# EAGLE board RFBoardLayoutGen0_v03.1routing_saved (EAGLE 7.2.0)
AUTHOR: Kirchschlager Raimund
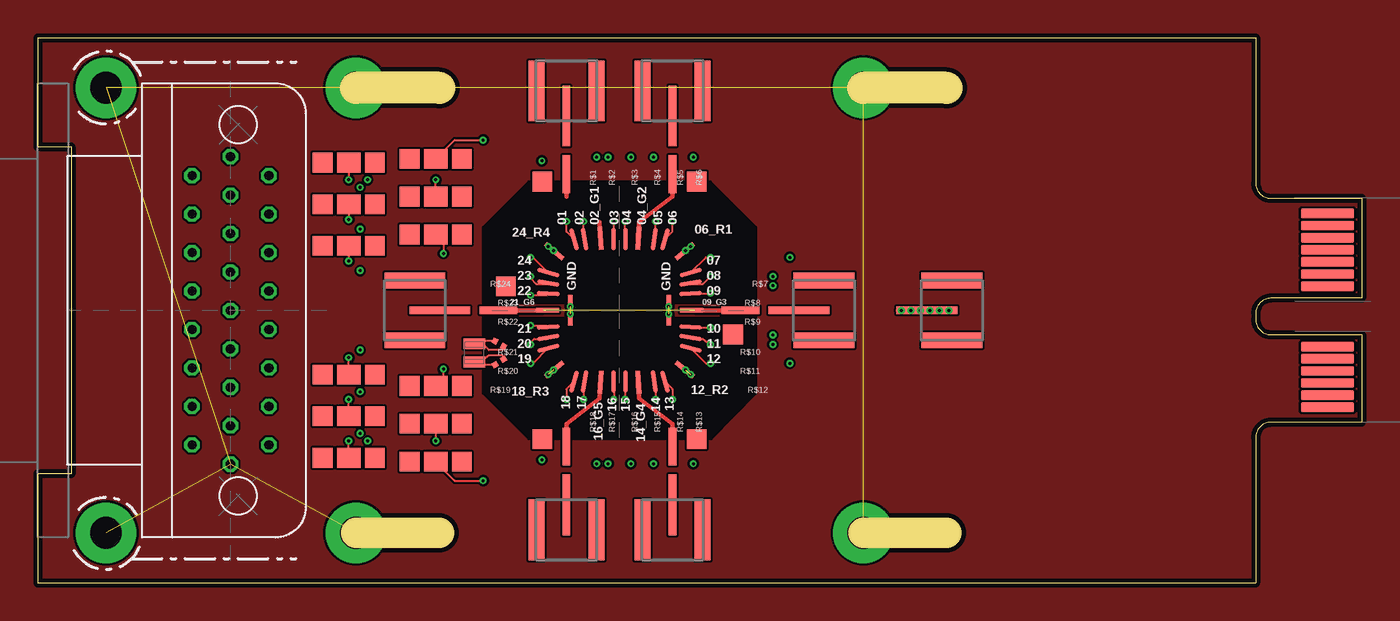
[diagram p0: board, top side]
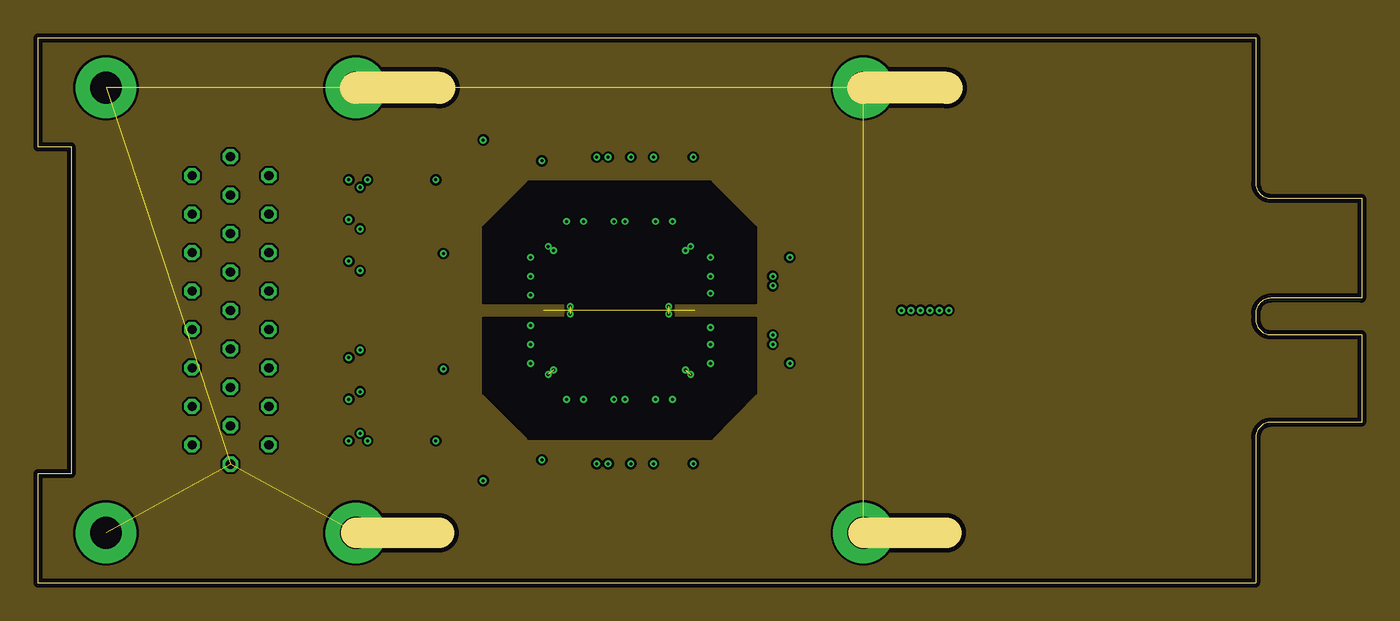
[diagram p1: board, inner layer Route2]
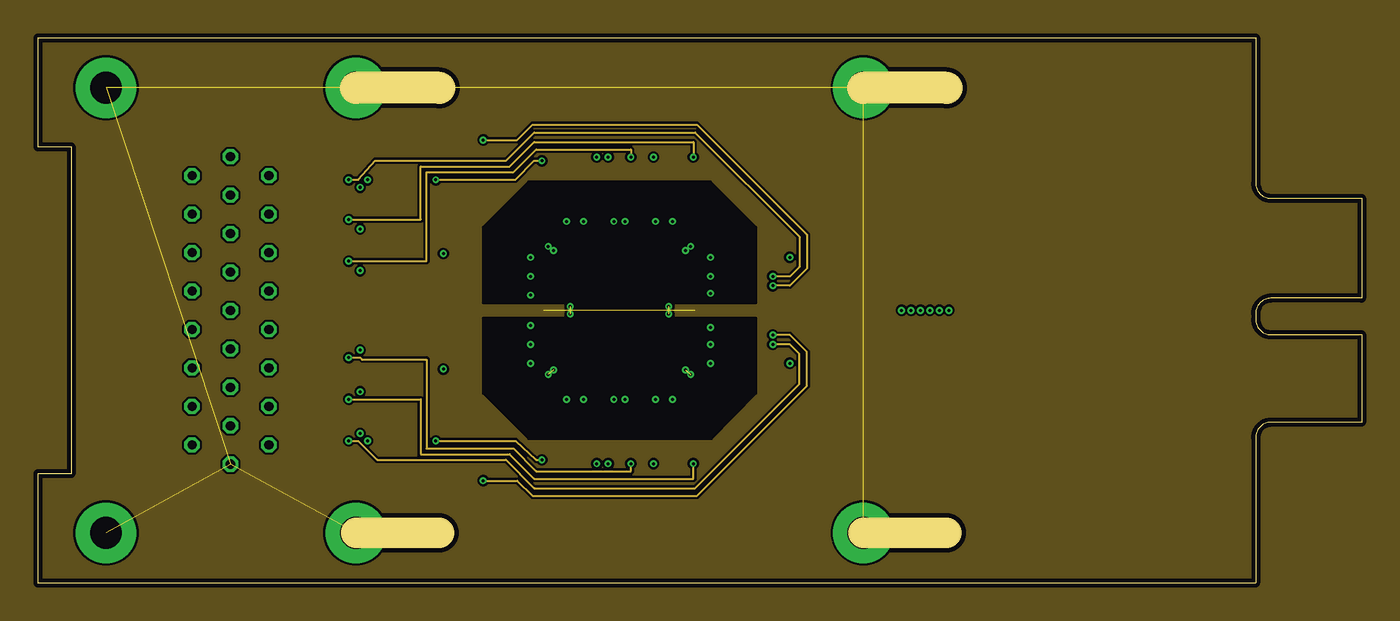
[diagram p2: board, inner layer Route3]
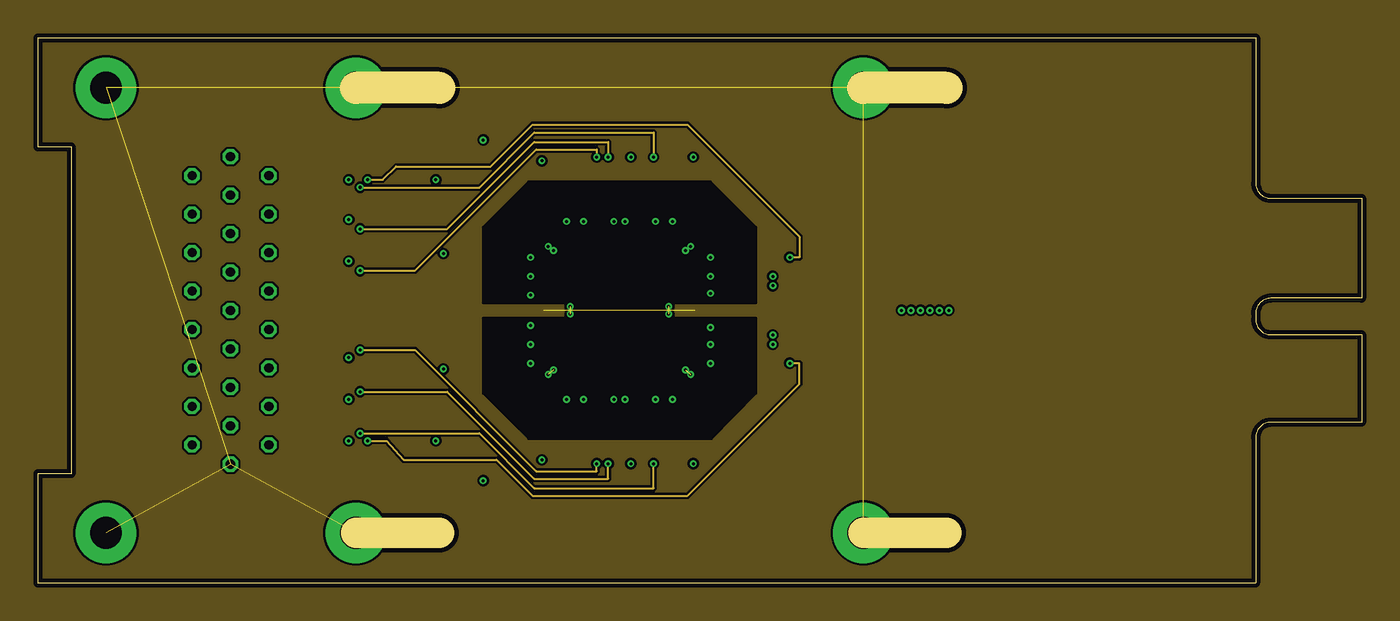
[diagram p3: board, inner layer Route14]
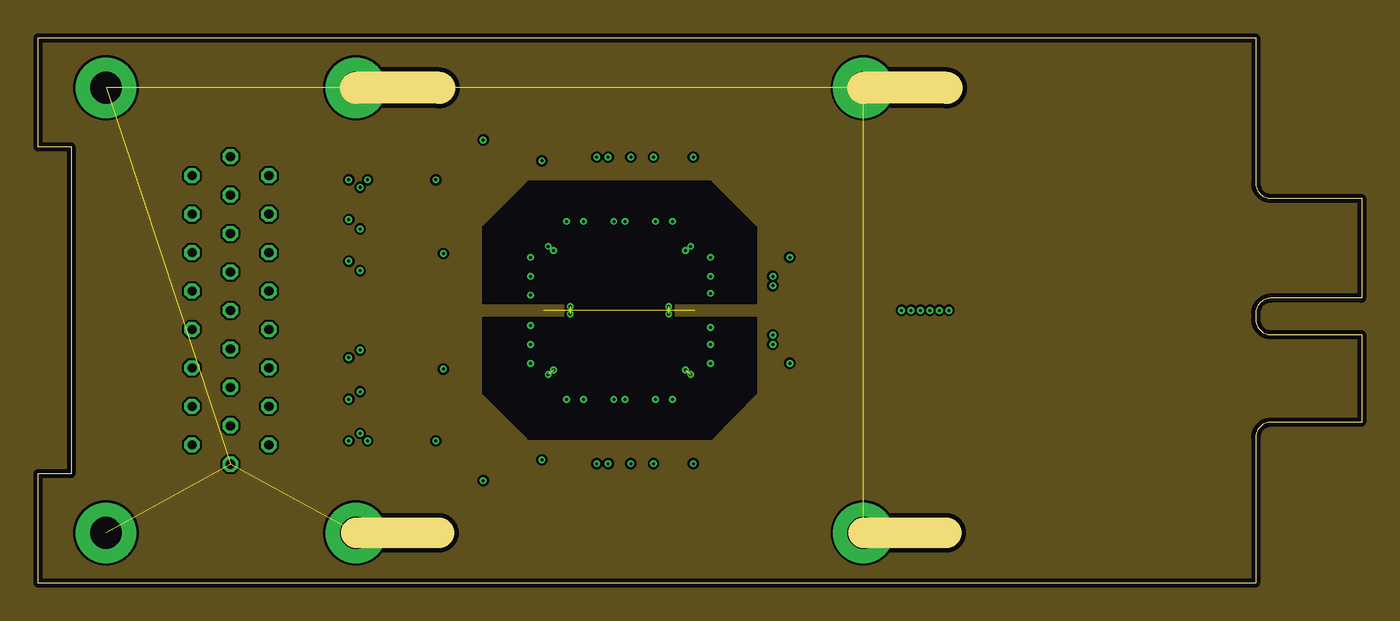
[diagram p4: board, inner layer Route15]
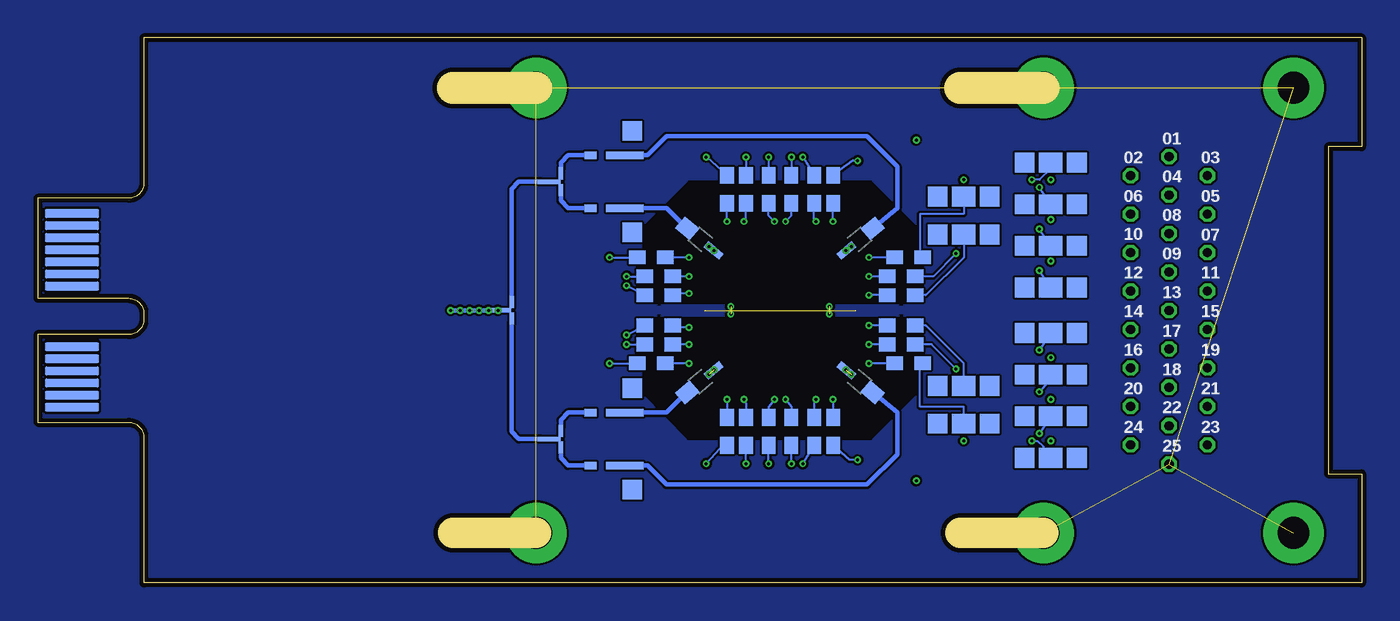
[diagram p5: board, bottom side, seen from below]

Size 87.4 x 36 mm. Coordinates in mm from the lower left corner, seen from the top.
Outline: 26.5,3.3 21,3.3
Outline: 26.5,32.7 21,32.7
Outline: 60,32.7 54.5,32.7
Outline: 60,3.3 54.5,3.3
Outline: 0,36 0,28.8 2.2,28.8 2.2,7.2 0,7.2 0,0 80.4,0 80.4,9.6 arc-90 81.4,10.6 87.4,10.6 87.4,16.4 81.4,16.4 arc-90 80.4,17.4 80.4,17.8 arc-90 81.4,18.8 87.4,18.8 87.4,25.4 81.4,25.4 arc-90 80.4,26.4 80.4,36 0,36
Copper layers (1+2+3*14+15+16): Top 0.035mm / dielectric 0.2mm / Route2 0.035mm / dielectric 0.36mm / Route3 0.035mm / dielectric 0.28mm / Route14 0.035mm / dielectric 0.36mm / Route15 0.035mm / dielectric 0.2mm / Bottom 0.035mm
Design rules "PCB-POOL HighSpec_ML6+": minimum track width 0.125mm, minimum drill 0.2mm, track to track 0.125mm, track to pad 0.125mm, pad to pad 0.125mm, via to via 0.125mm, smd to smd 0.125mm, copper to edge 0.3mm, drill to drill 0.2mm, minimum pad ring 0.2mm, minimum via ring 0.125mm, stop-mask expansion 0.075mm, vias tented up to drill 0.3mm, thermal gap 0.2mm
Net classes: 0 GND: clearance 0.15 mm; 1 RF: clearance 2 mm

## Footprints (pad centres in the part's own frame; a part is rotated, then mirrored left to right if it is on the bottom)
BIAS_TEE_DOWN_0603 = smd 0.8 x 0.5: HF 2.75,0 | smd 1.3 x 1.3: LF 0,1.6 | smd 2.5 x 0.5: OUT 0.5,0
BIAS_TEE_UP_0603 = smd 0.8 x 0.5: HF 2.75,0 | smd 1.3 x 1.3: LF 0,-1.6 | smd 2.5 x 0.5: OUT 0.5,0
24DC+10RF/400MU-PADS/0.7X0.7_V1.0 = smd 1.5 x 0.3 rotated 105: DC$01 -3,4.7 | smd 1.5 x 0.3 rotated 99: DC§02 -2.3,4.7 | smd 0.3 x 1.5: DC§03 -0.4,4.7; DC§04 0.4,4.7; DC§15 0.4,-4.7; DC§16 -0.4,-4.7 | smd 1.5 x 0.3 rotated 81: DC§05 2.3,4.7 | smd 1.5 x 0.3 rotated 75: DC§06 3,4.7 | smd 1.5 x 0.3 rotated 195: DC§07 4.7,2.5 | smd 1.5 x 0.3 rotated 189: DC§08 4.7,1.8 | smd 1.5 x 0.3 rotated 183: DC§09 4.7,1.1 | smd 1.5 x 0.3 rotated 177: DC§10 4.7,-1.1 | smd 1.5 x 0.3 rotated 171: DC§11 4.7,-1.8 | smd 1.5 x 0.3 rotated 165: DC§12 4.7,-2.5 | smd 1.5 x 0.3 rotated 285: DC§13 3,-4.7 | smd 1.5 x 0.3 rotated 279: DC§14 2.3,-4.7 | smd 1.5 x 0.3 rotated 261: DC§17 -2.3,-4.7 | smd 1.5 x 0.3 rotated 255: DC§18 -3,-4.7 | smd 1.5 x 0.3 rotated 15: DC§19 -4.7,-2.5 | smd 1.5 x 0.3 rotated 9: DC§20 -4.7,-1.8 | smd 1.5 x 0.3 rotated 3: DC§21 -4.7,-1.1 | smd 1.5 x 0.3 rotated 357: DC§22 -4.7,1.1 | smd 1.5 x 0.3 rotated 351: DC§23 -4.7,1.8 | smd 1.5 x 0.3 rotated 345: DC§24 -4.7,2.5 | smd 0.3 x 2: GND$1 -3.25,0; GND$2 3.25,0 | smd 1.5 x 0.3 rotated 93: RF$02_G1 -1.25,4.75 | smd 1.5 x 0.3 rotated 87: RF$04_G2 1.25,4.75 | smd 1.5 x 0.3: RF$06_G3 4.75,0; RF$21_G6 -4.75,0 | smd 1.5 x 0.3 rotated 40: RF$06_R1 4.3,3.9; RF$18_R3 -4.3,-3.9 | smd 1.5 x 0.3 rotated 140: RF$12_R2 4.3,-3.9; RF$24_R4 -4.3,3.9 | smd 1.5 x 0.3 rotated 273: RF$14_G4 1.25,-4.75 | smd 1.5 x 0.3 rotated 267: RF$16_G5 -1.25,-4.75
25_SOCKET_M83513/13-D = drill 0.6 octagon: 01 10.16,0; 02 8.89,2.54; 03 6.35,2.54; 04 3.81,2.54; 05 2.54,0; 06 1.27,2.54; 07 0,0; 08 -1.27,2.54; 09 -2.54,0; 10 -3.81,2.54; 11 -6.35,2.54; 12 -8.89,2.54; 13 -10.16,0; 14 8.89,-2.54; 15 7.62,0; 16 6.35,-2.54; 17 5.08,0; 18 3.81,-2.54; 19 1.27,-2.54; 20 -1.27,-2.54; 21 -3.81,-2.54; 22 -5.08,0; 23 -6.35,-2.54; 24 -7.62,0; 25 -8.89,-2.54
MEC8-113-02-L-D-RA1 = smd 0.6 x 3.5: 1 6.4,0.15; 3 5.6,0.15; 5 4.8,0.15; 7 4,0.15; 9 3.2,0.15; 11 2.4,0.15; 13 -1.6,0.15; 15 -2.4,0.15; 17 -3.2,0.15; 19 -4,0.15; 21 -4.8,0.15; 23 -5.6,0.15; 25 -6.4,0.15 | smd 0.6 x 3.5 bottom: 2 6.4,0.15; 4 5.6,0.15; 6 4.8,0.15; 8 4,0.15; 10 3.2,0.15; 12 2.4,0.15; 14 -1.6,0.15; 16 -2.4,0.15; 18 -3.2,0.15; 20 -4,0.15; 22 -4.8,0.15; 24 -5.6,0.15; 26 -6.4,0.15
SMD0.8-0,5 = smd 0.8 x 0.5: 1 0,0
RX-BR_V1 = smd 1.422 x 0.711 rotated 45: P$2 -0.02,-0.87; P$3 -0.87,-0.02 | smd 0.406 x 0.406 rotated 165: P$5 1.23,0.63; P$8 1.08,-0.02 | smd 0.406 x 0.406 rotated 105: P$6 0.63,1.23; P$7 -0.02,1.08
T_JUNCTION_0.3MM = smd 0.3 x 1.5 bottom: P$1 0,-0.75 | smd 0.8 x 0.3 bottom: P$2 -0.55,0.03; P$3 0.55,0.03 | smd 1 x 0.125 bottom: P$4 0,-0.06
L_MATCH = smd 1.3 x 0.5: 1 -1.15,0 | smd 1.25 x 1: 2 1.125,0
LP-FILTER/1_STAGE/OS/0603_TOP = smd 1.3 x 1.3: $1 1.85,0.01; $6 -1.6,0.01 | smd 1.55 x 1.3: $4 0.125,0.01
LP-FILTER/1_STAGE/OS/0603_BOTTOM = smd 1.3 x 1.3 bottom: $1 -1.6,0.01; $6 1.85,0.01 | smd 1.55 x 1.3 bottom: $4 0.125,0.01
LP-FILTER/RESISTOR/0603_BOTTOM = smd 1.1 x 0.9 bottom: IN -0.925,0; OUT 0.925,0
SMP_STRAIGHT_MINI = smd 0.5 x 4: 1 0,1.653 | smd 1.05 x 4: 2@1 -1.975,0; 2@2 1.975,0

## Placement (x,y rotation side)
B$1  [BIAS_TEE_DOWN_0603]  34.9,26.5 90 top
B$2  [BIAS_TEE_UP_0603]  41.9,26.5 90 top
B$3  [BIAS_TEE_UP_0603]  45.9,18 0 top
B$4  [BIAS_TEE_DOWN_0603]  41.9,9.5 270 top
B$5  [BIAS_TEE_UP_0603]  34.9,9.5 270 top
B$6  [BIAS_TEE_UP_0603]  30.9,18 180 top
B$7  [BIAS_TEE_UP_0603]  48.15,28.25 180 bottom
B$8  [BIAS_TEE_DOWN_0603]  48.15,24.75 180 bottom
B$9  [BIAS_TEE_UP_0603]  48.15,11.25 180 bottom
B$10  [BIAS_TEE_DOWN_0603]  48.15,7.75 180 bottom
E$1  [24DC+10RF/400MU-PADS/0.7X0.7_V1.0]  38.4,18 0 top
E$2  [25_SOCKET_M83513/13-D]  12.71,18 90 top
E$3  [MEC8-113-02-L-D-RA1]  85,18 270 top
E$30  [SMD0.8-0,5]  50.9,11.25 0 bottom
E$40  [RX-BR_V1]  29.44,15.19 315 top
E$48  [T_JUNCTION_0.3MM]  52.9,9.5 90 top
E$50  [T_JUNCTION_0.3MM]  56.15,18 90 top
E$51  [T_JUNCTION_0.3MM]  52.9,26.5 90 top
L$1  [L_MATCH]  33.14,22.7 40 bottom
L$2  [L_MATCH]  43.66,22.7 140 bottom
L$3  [L_MATCH]  43.66,13.3 220 bottom
L$4  [L_MATCH]  33.14,13.3 320 bottom
LP$1  [LP-FILTER/1_STAGE/OS/0603_TOP]  20.4,27.75 0 top
LP$2  [LP-FILTER/1_STAGE/OS/0603_TOP]  20.4,25 0 top
LP$3  [LP-FILTER/1_STAGE/OS/0603_TOP]  20.4,22.25 0 top
LP$4  [LP-FILTER/1_STAGE/OS/0603_TOP]  20.4,13.75 0 top
LP$5  [LP-FILTER/1_STAGE/OS/0603_TOP]  20.4,11 0 top
LP$6  [LP-FILTER/1_STAGE/OS/0603_TOP]  20.4,8.25 0 top
LP$7  [LP-FILTER/1_STAGE/OS/0603_BOTTOM]  20.4,27.75 0 top
LP$8  [LP-FILTER/1_STAGE/OS/0603_BOTTOM]  20.4,25 0 top
LP$9  [LP-FILTER/1_STAGE/OS/0603_BOTTOM]  20.4,22.25 0 top
LP$10  [LP-FILTER/1_STAGE/OS/0603_BOTTOM]  20.4,19.5 0 top
LP$11  [LP-FILTER/1_STAGE/OS/0603_BOTTOM]  20.4,16.5 0 top
LP$12  [LP-FILTER/1_STAGE/OS/0603_BOTTOM]  20.4,13.75 0 top
LP$13  [LP-FILTER/1_STAGE/OS/0603_BOTTOM]  20.4,11 0 top
LP$14  [LP-FILTER/1_STAGE/OS/0603_BOTTOM]  20.4,8.25 0 top
LP$15  [LP-FILTER/1_STAGE/OS/0603_TOP]  26.15,28 0 top
LP$16  [LP-FILTER/1_STAGE/OS/0603_TOP]  26.15,25.5 0 top
LP$17  [LP-FILTER/1_STAGE/OS/0603_TOP]  26.15,23 0 top
LP$18  [LP-FILTER/1_STAGE/OS/0603_TOP]  26.15,13 0 top
LP$19  [LP-FILTER/1_STAGE/OS/0603_TOP]  26.15,10.5 0 top
LP$20  [LP-FILTER/1_STAGE/OS/0603_TOP]  26.15,8 0 top
LP$21  [LP-FILTER/1_STAGE/OS/0603_BOTTOM]  26.15,25.5 0 top
LP$22  [LP-FILTER/1_STAGE/OS/0603_BOTTOM]  26.15,23 0 top
LP$23  [LP-FILTER/1_STAGE/OS/0603_BOTTOM]  26.15,13 0 top
LP$24  [LP-FILTER/1_STAGE/OS/0603_BOTTOM]  26.15,10.5 0 top
R$1  10K  [LP-FILTER/RESISTOR/0603_BOTTOM]  34.9,26 270 top
R$2  10K  [LP-FILTER/RESISTOR/0603_BOTTOM]  36.15,26 270 top
R$3  10K  [LP-FILTER/RESISTOR/0603_BOTTOM]  37.65,26 270 top
R$4  10K  [LP-FILTER/RESISTOR/0603_BOTTOM]  39.15,26 270 top
R$5  10K  [LP-FILTER/RESISTOR/0603_BOTTOM]  40.65,26 270 top
R$6  10K  [LP-FILTER/RESISTOR/0603_BOTTOM]  41.9,26 270 top
R$7  10K  [LP-FILTER/RESISTOR/0603_BOTTOM]  46.9,21.5 180 top
R$8  10K  [LP-FILTER/RESISTOR/0603_BOTTOM]  46.4,20.25 180 top
R$9  10K  [LP-FILTER/RESISTOR/0603_BOTTOM]  46.4,19 180 top
R$10  10K  [LP-FILTER/RESISTOR/0603_BOTTOM]  46.4,17 180 top
R$11  10K  [LP-FILTER/RESISTOR/0603_BOTTOM]  46.4,15.75 180 top
R$12  10K  [LP-FILTER/RESISTOR/0603_BOTTOM]  46.9,14.5 180 top
R$13  10K  [LP-FILTER/RESISTOR/0603_BOTTOM]  41.9,10 270 top
R$14  10K  [LP-FILTER/RESISTOR/0603_BOTTOM]  40.65,10 270 top
R$15  10K  [LP-FILTER/RESISTOR/0603_BOTTOM]  39.15,10 270 top
R$16  10K  [LP-FILTER/RESISTOR/0603_BOTTOM]  37.65,10 270 top
R$17  10K  [LP-FILTER/RESISTOR/0603_BOTTOM]  36.15,10 270 top
R$18  10K  [LP-FILTER/RESISTOR/0603_BOTTOM]  34.9,10 270 top
R$19  10K  [LP-FILTER/RESISTOR/0603_BOTTOM]  29.9,14.5 180 top
R$20  10K  [LP-FILTER/RESISTOR/0603_BOTTOM]  30.4,15.75 180 top
R$21  10K  [LP-FILTER/RESISTOR/0603_BOTTOM]  30.4,17 180 top
R$22  10K  [LP-FILTER/RESISTOR/0603_BOTTOM]  30.4,19 180 top
R$23  10K  [LP-FILTER/RESISTOR/0603_BOTTOM]  30.4,20.25 180 top
R$24  10K  [LP-FILTER/RESISTOR/0603_BOTTOM]  29.9,21.5 180 top
S$1  [SMP_STRAIGHT_MINI]  24.9,18 270 top
S$2  [SMP_STRAIGHT_MINI]  34.9,3.5 0 top
S$3  [SMP_STRAIGHT_MINI]  41.9,3.5 0 top
S$4  [SMP_STRAIGHT_MINI]  51.9,18 90 top
S$5  [SMP_STRAIGHT_MINI]  60.35,18 90 top
S$6  [SMP_STRAIGHT_MINI]  41.9,32.5 180 top
S$7  [SMP_STRAIGHT_MINI]  34.9,32.5 180 top

## Library data of the parts
B$1-B$10 = Bias tee
E$1 = SampleArea
E$2 = Glenair
E$3 = MEC8-130-02-X-D-RA1
E$30 = PADS
E$40 = TempSensors
E$48 E$50 E$51 = RF layout parts
L$1-L$4 = MatchCircuit
LP$1-LP$24 R$1-R$24 = LPFilter
S$1-S$7 = RF Connectors

## Nets
S$67: E$2.24
S$76: E$2.11
S$80: E$2.12
S$83: E$2.23
S$85: E$2.25
S$88: E$2.01
S$90: E$2.10
S$95: E$2.22
S$144: E$2.14
S$146: E$2.02
S$149: E$2.15
S$151: E$2.03
S$154: E$2.09
S$156: E$2.21
S$158: E$2.08
S$160: E$2.20
S$162: E$2.16
S$163 [RF]: E$1.RF$04_G2
S$166: E$1.DC§24 R$24.IN
S$168: E$2.17
S$170: E$2.05
S$171: E$2.07
S$174: E$2.13
S$175: E$2.06
S$178: E$2.18
S$180: E$1.DC§23 R$23.IN
S$181: E$1.DC§22 R$22.IN
S$183: E$3.12
S$184: E$1.DC§21 R$21.IN
S$185: E$1.DC§20 R$20.IN
S$186: E$1.DC§19 R$19.IN
S$187: E$1.DC$01 R$1.OUT
S$188: E$1.DC§02 R$2.OUT
S$189: E$1.DC§03 R$3.OUT
S$190: E$3.23
S$191: E$1.DC§04 R$4.OUT
S$193: E$1.DC§05 R$5.OUT
S$194: E$1.DC§06 R$6.OUT
S$195: E$1.DC§07 R$7.OUT
S$196: E$1.DC§08 R$8.OUT
S$199: E$1.DC§09 R$9.OUT
S$201: E$1.DC§10 R$10.OUT
S$202: E$1.DC§11 R$11.OUT
S$203: E$1.DC§12 R$12.OUT
S$204: E$1.DC§13 R$13.IN
S$205: E$1.DC§14 R$14.IN
S$206: E$1.DC§17 R$17.IN
S$207: E$1.DC§16 R$16.IN
S$208: E$1.DC§15 R$15.IN
S$209: E$1.DC§18 R$18.IN
S$216: LP$22.$4 R$22.OUT
S$217: LP$17.$4 R$23.OUT
S$218: LP$21.$4 R$24.OUT
S$219: LP$23.$4 R$21.OUT
S$220: LP$18.$4 R$20.OUT
S$221: LP$24.$4 R$19.OUT
S$222: LP$16.$4 R$1.IN
S$223: LP$19.$4 R$18.OUT
S$224: LP$11.$4 R$17.OUT
S$225: LP$10.$4 R$2.IN
S$226: LP$12.$4 R$16.OUT
S$227: LP$4.$4 R$15.OUT
S$228: LP$13.$4 R$14.OUT
S$229: LP$5.$4 R$13.OUT
S$230: LP$9.$4 R$3.IN
S$231: LP$3.$4 R$4.IN
S$232: LP$8.$4 R$5.IN
S$233: LP$2.$4 R$6.IN
S$234: LP$7.$4 R$7.IN
S$235: LP$1.$4 R$8.IN
S$236: LP$14.$4 R$12.IN
S$237: LP$6.$4 R$11.IN
S$238: LP$15.$4 R$9.IN
S$239: LP$20.$4 R$10.IN

## Tracks (layer width: path | path; a pad name or v marks a point on that pad's centre or on a via)
GND1
  pour Top (rank 6): -4.85,39.6 92.1,39.7 92.1,-4.7 -4.85,-4.8
  pour Route2 (rank 6): -7.5,41.1 92.6,41.6 92.6,-5.15 -7.5,-5.65
  pour Route15 (rank 6): -11.25,44.5 94.9,44.5 94.9,-11.4 -11.25,-11.4
  pour Bottom (rank 6): -16.65,49.3 97.15,49.2 97.15,-15.85 -16.65,-15.75
  pour Route3 (rank 6): -15.4,47.8 96.4,47.8 96.4,-13.85 -15.4,-13.75
  pour Route14 (rank 6): -12.9,45.3 95.9,45.2 95.9,-12.85 -12.9,-12.75
S$1  (via drill 0.2)
  Bottom 0.3: v57.02,18 v60.15,18
S$2
  Bottom 0.3: 50.9,28.25 52.4,28.25 52.87,27.75 52.87,27.25
S$12
  Bottom 0.3: 49.65,24.75 45.9,24.75 44.65,23.5
S$17
  Bottom 0.3: 52.87,25.75 52.87,25.25 52.4,24.75 50.9,24.75
S$55
  Bottom 0.3: 54.15,26.5 55.65,26.5 56.12,26 56.12,18.75
S$68
  Bottom 0.3: 32.15,23.5 30.65,24.75 30.65,27.5 32.65,29.5 45.9,29.5 47.15,28.25 48.4,28.25
S$79
  Bottom 0.3: 49.65,11.25 45.9,11.25 44.65,12.5
S$81
  Bottom 0.3: 50.9,11.25 52.4,11.25 52.87,10.75 52.87,10.25
S$82
  Top 0.5: 60.4,18 56.9,18
S$84
  Bottom 0.3: 50.9,7.75 52.4,7.75 52.87,8.25 52.87,8.75
S$86
  Bottom 0.3: 54.15,9.5 55.65,9.5 56.12,10 56.12,17.25
S$89
  Bottom 0.3: 48.4,7.75 47.15,7.75 45.9,6.5 32.65,6.5 30.65,8.5 30.65,11.25 32.15,12.5
S$91
  Top 0.3: 37.09,23.83 37.15,22.75
S$155
  Top 0.3: 34.9,28 34.9,25.5
S$157
  Top 0.3: 37.15,13.25 37.09,12.17 34.9,10.5 34.9,8
S$159  (1 unrouted)
  Top 0.3: 29.65,18 33.4,18 | 43.4,18 47.15,18
S$161
  Top 0.3: 39.65,13.25 39.7,12.17 41.9,10.5
S$163
  Top 0.3: 41.9,28 41.9,25.5 39.7,23.83 E$1.RF$04_G2
S$164
  Top 0.3: 41.9,10.5 41.9,8
S$165
  cutout Route2: 44.46,9.51 42.9,9.5 32.4,9.5 29.4,12.5 29.4,17.5 35.4,17.5 35.4,18.5 29.4,18.5 29.4,23.5 32.4,26.5 44.4,26.5 47.4,23.5 47.4,18.5 41.4,18.5 41.4,17.5 47.4,17.5 47.4,12.5
  cutout Route3: 44.46,9.51 42.9,9.5 32.4,9.5 29.4,12.5 29.4,17.5 35.4,17.5 35.4,18.5 29.4,18.5 29.4,23.5 32.4,26.5 44.4,26.5 47.4,23.5 47.4,18.5 41.4,18.5 41.4,17.5 47.4,17.5 47.4,12.5
  cutout Route14: 44.46,9.51 42.9,9.5 32.4,9.5 29.4,12.5 29.4,17.5 35.4,17.5 35.4,18.5 29.4,18.5 29.4,23.5 32.4,26.5 44.4,26.5 47.4,23.5 47.4,18.5 41.4,18.5 41.4,17.5 47.4,17.5 47.4,12.5
  cutout Route15: 44.46,9.51 42.9,9.5 32.4,9.5 29.4,12.5 29.4,17.5 35.4,17.5 35.4,18.5 29.4,18.5 29.4,23.5 32.4,26.5 44.4,26.5 47.4,23.5 47.4,18.5 41.4,18.5 41.4,17.5 47.4,17.5 47.4,12.5
  cutout Top: 44.46,9.51 42.9,9.5 32.4,9.5 29.4,12.5 29.4,17.5 35.4,17.5 35.4,18.5 29.4,18.5 29.4,23.5 32.4,26.5 44.4,26.5 47.4,23.5 47.4,18.5 41.4,18.5 41.4,17.5 47.4,17.5 47.4,12.5
  cutout Bottom: 44.46,9.51 42.9,9.5 32.4,9.5 29.4,12.5 29.4,17.5 35.4,17.5 35.4,18.5 29.4,18.5 29.4,23.5 32.4,26.5 44.4,26.5 47.4,23.5 47.4,18.5 41.4,18.5 41.4,17.5 47.4,17.5 47.4,12.5
S$166  (via drill 0.2)
  Top 0.125: v32.52,21.5 32.7,21.5 E$1.DC§24
  Bottom 0.125: R$24.IN v32.52,21.5
S$167  (via drill 0.2)
  other vias: 33.7,22.23 33.7,22.23
S$169  (via drill 0.2)  (1 unrouted)
  other vias: 33.7,13.77 34.04,14.06
S$172  (via drill 0.2)  (1 unrouted)
  other vias: 43.1,13.77 42.76,14.06
S$173  (via drill 0.2)
  other vias: 42.76,21.94
S$174  (via drill 2.1 pad 4)  (6 unrouted)
  other vias: 54.5,3.3 21,32.7 4.5,32.7 21,3.3 54.5,32.7 4.5,3.3
S$176  (via drill 0.2)  (1 unrouted)
  other vias: 41.65,17.75 41.65,18.25
S$177  (via drill 0.2)  (1 unrouted)
  other vias: 35.15,17.75 35.15,18.25
S$180  (via drill 0.2)
  Top 0.125: v32.52,20.25 32.52,20.12 32.9,19.75 33.65,19.75 E$1.DC§23
  Bottom 0.125: R$23.IN v32.52,20.25
S$181  (via drill 0.2)
  Top 0.125: v32.52,19 33.6,19 E$1.DC§22
  Bottom 0.125: R$22.IN v32.52,19
S$184  (via drill 0.2)
  Top 0.125: v32.52,17 33.6,17 E$1.DC§21
  Bottom 0.125: R$21.IN v32.52,17
S$185  (via drill 0.2)
  Top 0.125: v32.52,15.75 32.52,15.88 32.77,16.12 33.62,16.12 E$1.DC§20
  Bottom 0.125: R$20.IN v32.52,15.75
S$186  (via drill 0.2)
  Top 0.125: v32.52,14.5 32.7,14.5 E$1.DC§19
  Bottom 0.125: R$19.IN v32.52,14.5
S$187  (via drill 0.2)
  Top 0.125: E$1.DC$01 34.9,23.2 v34.9,23.88
  Bottom 0.125: v34.9,23.88 R$1.OUT
S$188  (via drill 0.2)
  Top 0.125: E$1.DC§02 36.02,22.77 v36.02,23.88
  Bottom 0.125: v36.02,23.88 36.15,24 R$2.OUT
S$189  (via drill 0.2)
  Top 0.125: E$1.DC§03 38.02,22.73 v38.02,23.88
  Bottom 0.125: v38.02,23.88 37.65,24.25 R$3.OUT
S$191  (via drill 0.2)
  Top 0.125: E$1.DC§04 38.77,22.73 v38.77,23.88
  Bottom 0.125: v38.77,23.88 39.15,24.25 R$4.OUT
S$192
  Top 0.125: 30.23,14.4 29.17,14.4
S$193  (via drill 0.2)
  Top 0.125: E$1.DC§05 40.77,22.77 v40.77,23.88
  Bottom 0.125: v40.77,23.88 40.65,24 R$5.OUT
S$194  (via drill 0.2)
  Top 0.125: E$1.DC§06 41.9,23.2 v41.9,23.88
  Bottom 0.125: v41.9,23.88 R$6.OUT
S$195  (via drill 0.2)
  Top 0.125: E$1.DC§07 44.1,21.5 v44.4,21.5
  Bottom 0.125: v44.4,21.5 R$7.OUT
S$196  (via drill 0.2)
  Top 0.125: E$1.DC§08 43.15,19.75 43.9,19.75 v44.4,20.25
  Bottom 0.125: v44.4,20.25 R$8.OUT
S$197
  Top 0.125: 29.08,14.48 29.79,15.02 30.67,15.02 30.76,14.75
S$198
  Top 0.125: 30.05,15.99 29.17,15.99
S$199  (via drill 0.2)
  Top 0.125: E$1.DC§09 43.12,19.12 v44.4,19.12
  Bottom 0.125: v44.4,19.12 45.4,19.12 R$9.OUT
S$200
  Top 0.125: 29.35,15.81 29.79,15.37 30.67,15.37 30.76,15.63
S$201  (via drill 0.2)
  Top 0.125: E$1.DC§10 43.12,16.88 v44.4,16.88
  Bottom 0.125: v44.4,16.88 45.02,16.88 45.15,17 R$10.OUT
S$202  (via drill 0.2)
  Top 0.125: E$1.DC§11 43.17,16.12 43.9,16.12 v44.4,15.75
  Bottom 0.125: v44.4,15.75 R$11.OUT
S$203  (via drill 0.2)
  Top 0.125: E$1.DC§12 44.1,14.5 v44.4,14.5
  Bottom 0.125: v44.4,14.5 R$12.OUT
S$204  (via drill 0.2)
  Top 0.125: E$1.DC§13 41.9,12.8 v41.9,12.12
  Bottom 0.125: v41.9,12.12 R$13.IN
S$205  (via drill 0.2)
  Top 0.125: E$1.DC§14 40.77,13.22 v40.77,12.12
  Bottom 0.125: v40.77,12.12 40.65,11.88 R$14.IN
S$206  (via drill 0.2)
  Top 0.125: E$1.DC§17 36.02,13.22 v36.02,12.12
  Bottom 0.125: v36.02,12.12 36.15,11.88 R$17.IN
S$207  (via drill 0.2)
  Top 0.125: E$1.DC§16 38.02,13.28 v38.02,12.12
  Bottom 0.125: v38.02,12.12 37.65,11.62 R$16.IN
S$208  (via drill 0.2)
  Top 0.125: E$1.DC§15 38.77,13.28 v38.77,12.12
  Bottom 0.125: v38.77,12.12 39.15,11.62 R$15.IN
S$209  (via drill 0.2)
  Top 0.125: E$1.DC§18 34.9,12.8 v34.9,12.12
  Bottom 0.125: v34.9,12.12 R$18.IN
S$210  (via drill 0.2)
  other vias: 58.9,18
S$211  (via drill 0.2)
  other vias: 58.27,18
S$212  (via drill 0.2)
  other vias: 59.52,18
S$213  (via drill 0.2)
  other vias: 57.65,18
S$214  (via drill 0.2)
  other vias: 43.1,22.23
S$215  (via drill 0.2)
  other vias: 34.04,21.94
S$216
  Bottom 0.125: LP$22.$4 26.27,21.5 28.77,19 R$22.OUT
S$217  (via drill 0.2)
  Top 0.125: LP$17.$4 26.77,22.76 v26.77,21.75
  Bottom 0.125: v26.77,21.75 28.27,20.25 R$23.OUT
S$218
  Bottom 0.125: LP$21.$4 26.27,24.38 29.15,24.38 29.15,21.5 R$24.OUT
S$219
  Bottom 0.125: LP$23.$4 26.27,14.5 28.77,17 R$21.OUT
S$220  (via drill 0.2)
  Top 0.125: LP$18.$4 26.77,13.26 v26.77,14.12
  Bottom 0.125: v26.77,14.12 28.4,15.75 R$20.OUT
S$221
  Bottom 0.125: LP$24.$4 26.27,11.62 29.15,11.62 29.15,14.5 R$19.OUT
S$222  (via drill 0.2)
  Top 0.125: LP$16.$4 v26.27,26.62
  Route3 0.125: v26.27,26.62 31.52,26.62 32.77,27.88 v33.27,27.88
  Bottom 0.125: v33.27,27.88 33.57,27.88 R$1.IN
S$223  (via drill 0.2)
  Top 0.125: LP$19.$4 v26.27,9.38
  Route3 0.125: v26.27,9.38 31.52,9.38 32.9,8.12 v33.27,8.12
  Bottom 0.125: v33.27,8.12 33.82,8.12 R$18.OUT
S$224  (via drill 0.2)
  Route14 0.125: v21.27,15.38 24.9,15.38 32.9,7.38 36.9,7.38 v36.9,7.88
  Bottom 0.125: LP$11.$4 v21.27,15.38 | v36.9,7.88 R$17.OUT
S$225  (via drill 0.2)
  Route14 0.125: v21.27,20.62 24.9,20.62 32.9,28.62 36.9,28.62 v36.9,28.12
  Bottom 0.125: LP$10.$4 20.77,19.89 v21.27,20.62 | v36.9,28.12 R$2.IN
S$226  (via drill 0.2)
  Route14 0.125: v21.27,12.62 27.02,12.62 32.77,6.88 37.65,6.88 v37.65,7.88
  Bottom 0.125: LP$12.$4 20.52,13.5 v21.27,12.62 | v37.65,7.88 R$16.OUT
S$227  (via drill 0.2)
  Top 0.125: LP$4.$4 v20.52,14.88
  Route3 0.125: v20.52,14.88 21.27,14.88 21.4,14.75 25.65,14.75 25.65,8.88 31.4,8.88 32.9,7.38 39.15,7.38 v39.15,7.88
  Bottom 0.125: v39.15,7.88 R$15.OUT
S$228  (via drill 0.2)
  Route14 0.125: v21.27,9.88 29.15,9.88 32.77,6.25 40.65,6.25 v40.65,7.88
  Bottom 0.125: LP$13.$4 v21.27,9.88 | v40.65,7.88 R$14.OUT
S$229  (via drill 0.2)
  Top 0.125: LP$5.$4 v20.52,12.12
  Route3 0.125: v20.52,12.12 25.27,12.12 25.27,8.5 31.15,8.5 32.77,6.88 43.27,6.88 v43.27,7.88
  Bottom 0.125: v43.27,7.88 42.07,9.2 R$13.OUT
S$230  (via drill 0.2)
  Route14 0.125: v21.27,23.38 27.02,23.38 32.77,29.12 37.65,29.12 v37.65,28.12
  Bottom 0.125: LP$9.$4 v21.27,23.38 | v37.65,28.12 R$3.IN
S$231  (via drill 0.2)
  Top 0.125: LP$3.$4 v20.52,21.25
  Route3 0.125: v20.52,21.25 25.65,21.25 25.65,27.12 31.4,27.12 32.9,28.62 39.15,28.62 v39.15,28.12
  Bottom 0.125: v39.15,28.12 R$4.IN
S$232  (via drill 0.2)
  Route14 0.125: v21.27,26.12 29.15,26.12 32.77,29.75 40.65,29.75 v40.65,28.12
  Bottom 0.125: LP$8.$4 v21.27,26.12 | v40.65,28.12 R$5.IN
S$233  (via drill 0.2)
  Top 0.125: LP$2.$4 v20.52,24
  Route3 0.125: v20.52,24 25.27,24 25.27,27.5 31.15,27.5 32.77,29.12 43.27,29.12 v43.27,28.12
  Bottom 0.125: v43.27,28.12 43.23,28.12 R$6.IN
S$234  (via drill 0.2)
  Route14 0.125: v21.77,26.62 22.77,26.62 23.65,27.5 29.9,27.5 32.65,30.25 42.9,30.25 50.27,22.88 50.27,21.5 v49.65,21.5
  Bottom 0.125: LP$7.$4 20.52,27.38 21.27,26.62 v21.77,26.62 | v49.65,21.5 R$7.IN
S$235  (via drill 0.2)
  Top 0.125: LP$1.$4 v20.52,26.62
  Route3 0.125: v20.52,26.62 21.15,26.62 22.27,27.88 30.9,27.88 32.77,29.75 43.4,29.75 50.27,22.88 50.27,20.88 49.65,20.25 v48.52,20.25
  Bottom 0.125: v48.52,20.25 R$8.IN
S$236  (via drill 0.2)
  Route14 0.125: v21.77,9.38 23.02,9.38 24.15,8.12 30.27,8.12 32.65,5.75 42.9,5.75 50.27,13.12 50.27,14.5 v49.65,14.5
  Bottom 0.125: v49.65,14.5 R$12.IN | v21.77,9.38 21.4,9.38 21.02,9 20.91,8.26 LP$14.$4
S$237  (via drill 0.2)
  Top 0.125: LP$6.$4 v20.52,9.38
  Route3 0.125: v20.52,9.38 21.15,9.38 22.4,8.12 30.9,8.12 32.77,6.25 43.4,6.25 50.27,13.12 50.27,15.12 49.65,15.75 v48.52,15.75
  Bottom 0.125: v48.52,15.75 R$11.IN
S$238  (via drill 0.2)
  Top 0.125: LP$15.$4 27.52,29.25 v29.4,29.25
  Route3 0.125: v29.4,29.25 31.65,29.25 32.65,30.25 43.52,30.25 50.77,23 50.77,20.75 49.65,19.62 v48.52,19.62
  Bottom 0.125: v48.52,19.62 R$9.IN
S$239  (via drill 0.2)
  Top 0.125: LP$20.$4 27.52,6.75 v29.4,6.75
  Route3 0.125: v29.4,6.75 31.65,6.75 32.65,5.75 43.52,5.75 50.77,13 50.77,15.25 49.65,16.38 v48.52,16.38
  Bottom 0.125: v48.52,16.38 R$10.IN

## Text on the board
tPlace: 4 | 2 | 22 | 24 | 11 | 19 | 21 | 8 | 17 | DESIGN BY J.K. & R.K. | GROUP G. KATSAROS | 15 | RF-BOARD V2.2 / safe ver
bPlace: 5 | 3 | 23 | VB2 / 1 | 18 | 16 | VB1_CL / 13 | 14 | 10 | 6 / VB1_Pi | 9 | 01 | 03 | 02 | 04 | 05 | 06 | 08 | 07 | 10 | 09 | 11 | 12 | 13 | 15 | 14 | 17 | 19 | 16 | 18 | 21 | 20 | 22 | 23 | 24 | 25